# EAGLE board OmniBot_motor_driver (EAGLE 9.4.2)
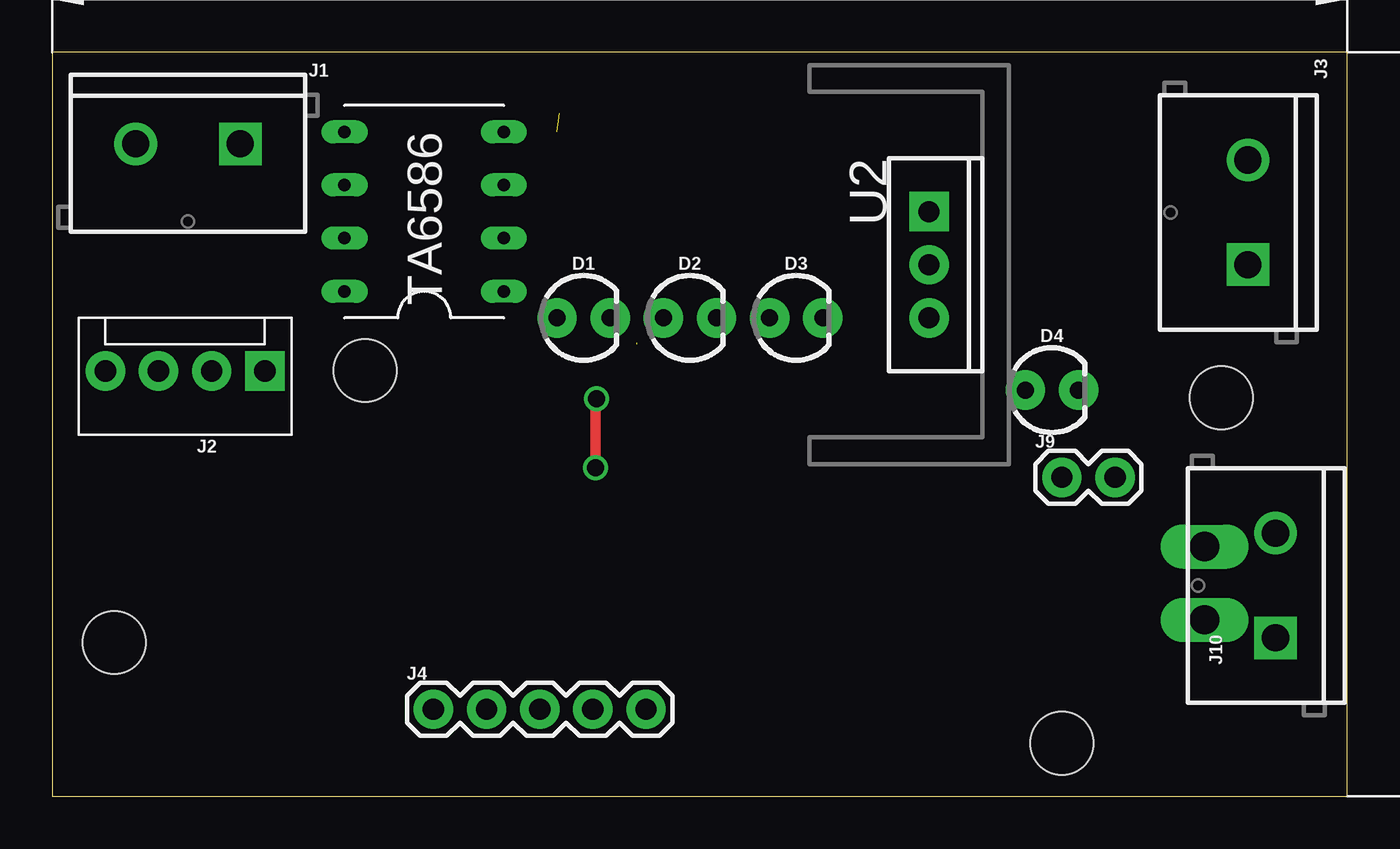
[diagram p0: board, top side]
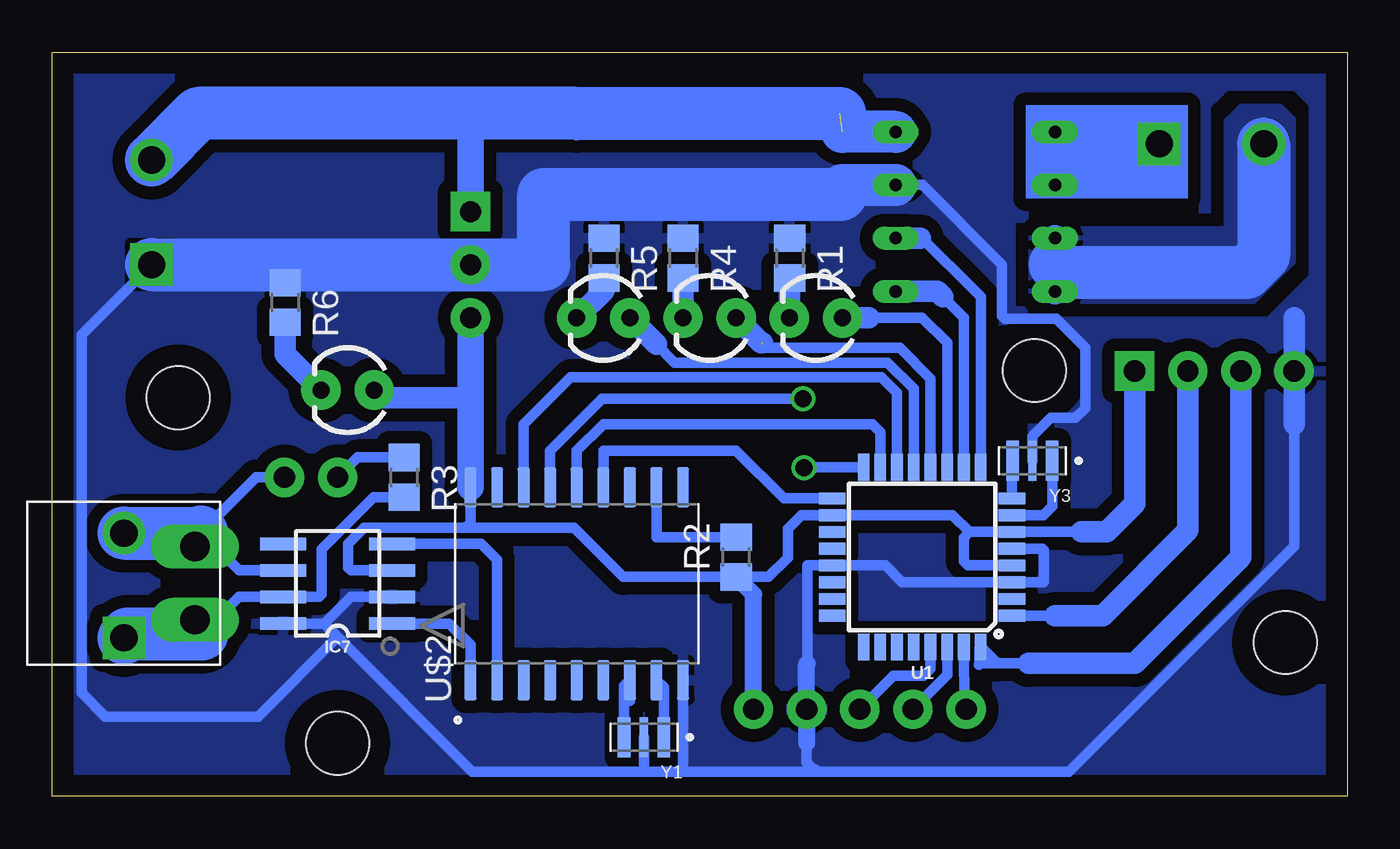
[diagram p1: board, bottom side, seen from below]

Size 61.9 x 35.55 mm. Coordinates in mm from the lower left corner, seen from the top.
Outline: 0,0 61.9,0 61.9,35.55 0,35.55 0,0
Copper layers (1*16): Top 0.035mm / dielectric 1.5mm / Bottom 0.035mm
Design rules "default": minimum track width 6mil, minimum drill 0.35mm, track to track 6mil, track to pad 6mil, pad to pad 6mil, via to via 6mil, smd to smd 6mil, copper to edge 40mil, drill to drill 6mil, minimum pad ring 10mil, minimum via ring 8mil, stop-mask expansion 4mil, vias tented up to drill 0mil, thermal gap 10mil
Net classes: 0 default: width 0.5 mm, drill 1.2 mm, clearance 0.2 mm
Holes 3 mm at 2.97,7.35 48.26,2.54 55.88,19.05 14.95,20.34

## Footprints (pad centres in the part's own frame; a part is rotated, then mirrored left to right if it is on the bottom)
LED_3MM = drill 0.813 pad 1.88: A -1.27,0; K 1.27,0
SOIC8 = smd 2.2 x 0.6: 1 -2.6,1.905; 2 -2.6,0.635; 3 -2.6,-0.635; 4 -2.6,-1.905; 5 2.6,-1.905; 6 2.6,-0.635; 7 2.6,0.635; 8 2.6,1.905
SCREWTERMINAL-5MM-2 = drill 1.3 pad 2.032 square: 1 0,0 | drill 1.3 pad 2.032: 2 5,0
MOLEX-1X4 = drill 1.016 pad 1.88 square: 1 0,0 | drill 1.016 pad 1.88: 2 2.54,0; 3 5.08,0; 4 7.62,0
1X05 = drill 1.016 pad 1.88: 1 0,0; 2 2.54,0; 3 5.08,0; 4 7.62,0; 5 10.16,0
1X02 = drill 1.016 pad 1.88: 1 0,0; 2 2.54,0
R0805 = smd 1.3 x 1.5: 1 -0.95,0; 2 0.95,0
TQFP32-08 = smd 1.27 x 0.559: 1 -4.293,2.8; 2 -4.293,2; 3 -4.293,1.2; 4 -4.293,0.4; 5 -4.293,-0.4; 6 -4.293,-1.2; 7 -4.293,-2; 8 -4.293,-2.8; 17 4.293,-2.8; 18 4.293,-2; 19 4.293,-1.2; 20 4.293,-0.4; 21 4.293,0.4; 22 4.293,1.2; 23 4.293,2; 24 4.293,2.8 | smd 0.559 x 1.27: 9 -2.8,-4.293; 10 -2,-4.293; 11 -1.2,-4.293; 12 -0.4,-4.293; 13 0.4,-4.293; 14 1.2,-4.293; 15 2,-4.293; 16 2.8,-4.293; 25 2.8,4.293; 26 2,4.293; 27 1.2,4.293; 28 0.4,4.293; 29 -0.4,4.293; 30 -1.2,4.293; 31 -2,4.293; 32 -2.8,4.293
TO220-IGO = drill 1 pad 1.88: GND 0,0; OUT 2.54,0 | drill 1 pad 1.88 square: IN -2.54,0
15EDGRC-3.5-2P-PAK = drill 1.4 long: P$1 -1.75,-3.4; P$2 1.75,-3.4
SOIC127P1030X265-18N = smd 1.91 x 0.6: 1 -4.61,5.08; 2 -4.61,3.81; 3 -4.61,2.54; 4 -4.61,1.27; 5 -4.61,0; 6 -4.61,-1.27; 7 -4.61,-2.54; 8 -4.61,-3.81; 9 -4.61,-5.08; 10 4.61,-5.08; 11 4.61,-3.81; 12 4.61,-2.54; 13 4.61,-1.27; 14 4.61,0; 15 4.61,1.27; 16 4.61,2.54; 17 4.61,3.81; 18 4.61,5.08
TA6586-FOOTPRINT = drill 0.6 long: BI -3.81,3.81; BO1 3.81,1.27; BO2 3.81,3.81; FI -3.81,1.27; FO1 3.81,-3.81; FO2 3.81,-1.27; GND -3.81,-1.27; VCC -3.81,-3.81
OSC_CSTCE16M0V53-R0 = smd 0.6 x 1.9: 1 -0.95,0; 3 0.95,0 | smd 0.4 x 1.9: 2 0,0

## Placement (x,y rotation side)
D1  [LED_3MM]  25.4,22.86 0 top
D2  [LED_3MM]  30.48,22.86 0 top
D3  [LED_3MM]  35.56,22.86 0 top
D4  [LED_3MM]  47.78,19.41 0 top
IC7  TJA1050T  [SOIC8]  48.26,10.16 180 bottom
J1  MOTOR  [SCREWTERMINAL-5MM-2]  8.99,31.17 180 top
J2  encoder_port  [MOLEX-1X4]  10.16,20.32 180 top
J3  POWER  [SCREWTERMINAL-5MM-2]  57.15,25.4 90 top
J4  [1X05]  18.22,4.16 0 top
J9  RES JUMPER  [1X02]  48.26,15.24 0 top
J10  CAN TERMINAL  [SCREWTERMINAL-5MM-2]  58.48,7.57 90 top
R1  10k  [R0805]  26.65,25.72 270 bottom
R2  10k  [R0805]  29.21,11.43 90 bottom
R3  10k  [R0805]  45.09,15.24 270 bottom
R4  10k  [R0805]  31.75,25.72 270 bottom
R5  10k  [R0805]  35.53,25.72 270 bottom
R6  10k  [R0805]  50.77,23.59 270 bottom
U1  ATMEGA328P_TQFP  [TQFP32-08]  20.32,11.43 180 bottom
U2  [TO220-IGO]  41.91,25.4 270 top
U$1  15EDGRC-3.5-2P  [15EDGRC-3.5-2P-PAK]  58.49,10.18 90 bottom
U$2  MCP2515-I/SO  [SOIC127P1030X265-18N]  36.83,10.16 90 bottom
U$3  TA6586  [TA6586-FOOTPRINT]  17.78,27.94 180 top
Y1  CSTCE16M0V53-R0  [OSC_CSTCE16M0V53-R0]  33.62,2.82 180 bottom
Y3  CSTCE16M0V53-R0  [OSC_CSTCE16M0V53-R0]  15.05,16.03 180 bottom

## Library data of the parts
D1-D4 = SparkFun-LED; PROD_ID: DIO-08794
IC7 = TJA1050; MF: NXP; MPN: TJA1050T
J1 J3 J10 = SparkFun-Connectors; SF_SKU: PRT-08432
J2 = SparkFun-Connectors; PROD_ID: CONN-08186; SF_ID: PRT-08231
J4 J9 = SparkFun-Connectors
R1-R6 = resistor
U1 = SparkFun-IC-Microcontroller; PROD_ID: IC-09069
U2 = SparkFun-IC-Power
U$1 = 15EDGRC-3.5-2P; AVAILABILITY: Not in stock; CHECK_PRICES: https://www.snapeda.com/parts/15EDGRC-3.5/2P/Degson/view-part/?ref=eda; DESCRIPTION: Pluggable terminal block; socket; male; 3.5mm; angled 90°; ways: 2; MF: Degson; MP: 15EDGRC-3.5/2P; PACKAGE: None; PRICE: None; SNAPEDA_LINK: https://www.snapeda.com/parts/15EDGRC-3.5/2P/Degson/view-part/?ref=snap
U$2 = MCP2515-I_SO; AVAILABILITY: In Stock; CHECK_PRICES: https://www.snapeda.com/parts/MCP2515-I/SO/Microchip/view-part/?ref=eda; DESCRIPTION: Microchip CAN Controller 1Mbit/s CAN 2.0B 18-Pin SOIC W | Microchip Technology Inc. MCP2515-I/SO; MF: Microchip; MP: MCP2515-I/SO; PACKAGE: SOIC-18 Microchip; PRICE: None; PURCHASE-URL: https://www.snapeda.com/api/url_track_click_mouser/?unipart_id=39881&manufacturer=Microchip&part_name=MCP2515-I/SO&search_term=None; SNAPEDA_LINK: https://www.snapeda.com/parts/MCP2515-I/SO/Microchip/view-part/?ref=snap
U$3 = TA6586; AVAILABILITY: Not in stock; CHECK_PRICES: https://www.snapeda.com/parts/TA6586/Wuxi/view-part/?ref=eda; DESCRIPTION: DC Bidirectional motor driving circuit; MF: Wuxi; MP: TA6586; PACKAGE: Package; PRICE: None; SNAPEDA_LINK: https://www.snapeda.com/parts/TA6586/Wuxi/view-part/?ref=snap
Y1 Y3 = CSTCE16M0V53-R0; AVAILABILITY: In Stock; CHECK_PRICES: https://www.snapeda.com/parts/CSTCE16M0V53-R0/Murata+Electronics+North+America/view-part/?ref=eda; DESCRIPTION: 16 MHz Ceramic Resonator Built in Capacitor 15 pF ±0.3% -20°C ~ 80°C Surface Mount; MF: Murata; MP: CSTCE16M0V53-R0; PACKAGE: SMD-3 Murata; PRICE: None; SNAPEDA_LINK: https://www.snapeda.com/parts/CSTCE16M0V53-R0/Murata+Electronics+North+America/view-part/?ref=snap

## Nets
+5V: D4.A IC7.3 J2.1 J4.5 R2.1 U1.4 U1.6 U1.18 U2.OUT U$2.18
BI: U1.10 U$3.BI
CAN_CS: U1.14 U$2.16
FI: U1.9 U$3.FI
GND: IC7.2 IC7.8 J2.4 J3.1 J4.4 R1.1 R4.1 R5.1 R6.1 U1.3 U1.5 U1.21 U2.GND U$2.9 U$3.GND Y1.2 Y3.2
INT_0: J2.2 U1.1
INT_1: J2.3 U1.32
N$1: U1.8 Y3.3
N$2: U$2.8 Y1.1
N$3: U1.7 Y3.1
N$4: IC7.1 U$2.1
N$5: IC7.4 U$2.2
N$6: R2.2 U$2.11
N$7: J1.1 U$3.FO1 U$3.FO2
N$8: J1.2 U$3.BO1 U$3.BO2
N$9: U$2.7 Y1.3
N$10: IC7.6 J9.2 J10.2 U$1.P$2
N$11: D1.A U1.11
N$12: J9.1 R3.1
N$13: IC7.7 J10.1 R3.2 U$1.P$1
N$14: D2.A U1.12
N$15: D3.A U1.13
N$16: D1.K R1.2
N$17: D2.K R4.2
N$18: D3.K R5.2
N$19: D4.K R6.2
RST: J4.3 U1.29
RX: J4.2 U1.30
SPI_MISO: U1.16 U$2.15
SPI_MOSI: U1.15 U$2.14
SPI_SCK: U1.17 U$2.13
TX: J4.1 U1.31
V+: J3.2 U2.IN U$3.VCC

## Tracks (layer width: path | path; a pad name or v marks a point on that pad's centre or on a via)
+5V
  Bottom 0.5: U$2.18 41.91,13.08 42.16,12.83 | IC7.3 47.62,10.79 47.75,10.92 47.75,12.06 46.99,12.83 42.16,12.83 | R2.1 34.61,10.48 36.96,12.83 42.16,12.83 | 18.07,12.63 U1.6 12.7,12.63 | 18.07,12.63 18.33,12.37 18.33,11.24 18.13,11.03 U1.4 | 18.07,12.63 18.87,13.43 U1.18 26.08,13.43 26.74,12.77 26.74,11.41 27.67,10.48 R2.1 | 29.05,10.32 R2.1
  Bottom 0.813: J4.5 28.38,9.65 29.05,10.32
  Bottom 1.016: J2.1 10.16,13.97 11.5,12.63 12.7,12.63 | D4.A 46.16,19.05 41.91,19.05
  Bottom 1.27: U2.OUT 41.91,19.05 U$2.18
BI
  Bottom 0.5: 18.32,22.86 19.32,23.86
  Bottom 0.508: U1.10 18.32,22.86
  Bottom 1.016: 19.32,23.86 19.59,24.13 U$3.BI
CAN_CS
  Bottom 0.5: U$2.16 39.37,17.78 37.12,20.02 22.27,20.02 21.52,19.27 U1.14
FI
  Bottom 0.5: 17.78,24.13 20.32,26.67 20.41,26.67
  Bottom 0.508: U1.9 17.52,23.87 17.78,24.13
  Bottom 1.016: U$3.FI 20.41,26.67
GND
  Bottom 0.5: IC7.2 47.62,9.53 48.9,8.26 | 48.9,8.26 IC7.8 | U$2.9 31.75,1.27 31.85,1.17 33.02,1.17 33.61,1.17 33.62,1.18 | 33.62,1.18 Y1.2 | 33.62,1.18 41.82,1.18 48.26,7.62 | 48.9,8.26 48.26,7.62 | U1.5 14.58,11.83 14.5,11.75 14.5,10.25 14.52,10.23 U1.3 21.28,10.23 22.08,11.03 U1.21 25.81,11.03 25.81,6.35 | J3.1 60.49,22.06 60.49,4.94 59.36,3.81 52.07,3.81 48.26,7.62 | 25.84,2.54 25.84,1.61 25.49,1.27 25.4,1.27 | U2.GND 38.41,25.4 38.1,25.4 | U$3.GND 20.31,29.21 16.5,25.41 16.5,22.96 16.36,22.81 13.91,22.81 12.53,21.43 12.53,18.55 13,18.08 14.17,18.08 15.05,17.2 Y3.2 | 13.32,1.17 2.54,11.95 2.54,17.78
  Bottom 0.508: 33.02,1.17 13.32,1.17
  Bottom 0.813: 25.81,6.35 25.84,6.32 J4.4 25.84,2.54
  Bottom 1.016: 2.54,17.78 J2.4 2.54,22.86
  Bottom 1.27: 24.21,28.77 24.13,28.85 24.13,29.21
  Bottom 2: 24.13,29.21 U$3.GND
  Bottom 2.54: J3.1 38.41,25.4 38.41,28.77 24.21,28.77
  pour Bottom (isolate 0.61, rank 3): -1.27,38.1 -1.27,-1.27 63.5,-1.27 63.5,38.1
INT_0
  Bottom 0.5: 13.97,8.63 U1.1
  Bottom 1.016: J2.2 7.62,12.7 11.69,8.63 13.97,8.63
INT_1
  Bottom 0.5: 15.24,6.35 16.73,6.35 | 16.73,6.35 17.56,6.35 17.59,6.32 | 17.62,6.29 17.59,6.32 | 17.59,6.32 17.59,7.07 U1.32 16.73,6.35
  Bottom 1.016: J2.3 5.08,11.43 10.16,6.35 15.24,6.35
N$1
  Bottom 0.5: Y3.3 16.03,16 U1.8
N$2
  Bottom 0.5: Y1.1 32.67,5.2 U$2.8
N$3
  Bottom 0.5: Y3.1 14.1,13.86 14.53,13.43 U1.7
N$4
  Bottom 0.5: U$2.1 41.91,7.24 42.93,8.26 IC7.1
N$5
  Bottom 0.5: U$2.2 40.64,11.3 41.4,12.06 IC7.4
N$6
  Bottom 0.5: R2.2 29.22,12.37 33.02,12.37 U$2.11
N$7
  Bottom 1.27: U$3.FO1 13.97,30.47 U$3.FO2
  Bottom 2.54: 13.97,30.47 13.86,30.58 J1.1 13.39,31.17 U$3.FO1
N$8
  Bottom 1.27: U$3.BO1 13.97,25.4 U$3.BO2
  Bottom 2.54: J1.2 3.99,25.85 4.8,25.04 13.61,25.04 13.97,25.4
  pour Bottom: 2.54,31.75 2.54,25.49 4.39,23.63 4.44,23.59 14.84,23.59 15.16,23.92 15.16,27.19 5.87,27.19 5.82,27.15 5.82,32.32 5.38,32.77 5.11,33.03 3.17,33.03 2.54,32.41
N$9
  Bottom 0.5: 34.29,4.57 U$2.7 34.57,5.27 Y1.3
N$10
  Bottom 0.5: IC7.6 52.96,10.79 54.74,12.57 | J9.2 52.16,15.24 54.78,12.62 54.84,12.57 54.84,12.18 U$1.P$2
  Bottom 2.54: J10.2 54.84,12.57 | 54.78,12.62 54.74,12.57
N$11
  Bottom 0.5: 22.86,22.86 20.32,22.86 19.12,21.66 U1.11
  Bottom 1.016: D1.A 22.86,22.86
N$12
  Bottom 0.5: R3.1 47.31,16.19 J9.1
N$13
  Bottom 0.5: R3.2 46.54,14.29 49.02,11.81 49.02,9.65 49.15,9.53 IC7.7 52.96,9.53 54.74,7.75 | U$1.P$1 57.62,8.43 58.3,7.75
  Bottom 2.54: 54.74,7.75 58.3,7.75 J10.1
N$14  (1 unrouted)
  Bottom 0.5: 27.94,21.59 27.78,21.43 21.38,21.43 19.92,19.96 U1.12
  Bottom 1.016: D2.A 28.03,21.68 27.94,21.68
N$15
  Bottom 0.5: U1.13 20.72,19.48 21.97,20.73 32.16,20.73 33.02,21.59
  Bottom 1.016: D3.A 33.02,21.59
N$16
  Bottom 0.5: 26.65,24.13 R1.2
  Bottom 1.016: D1.K 26.65,22.88 26.65,24.13
N$17
  Bottom 0.5: 31.75,24.13 R4.2
  Bottom 1.016: D2.K 31.75,24.13
N$18
  Bottom 0.5: 35.53,24.16 R5.2
  Bottom 1.016: D3.K 35.53,24.16
N$19
  Bottom 1.016: D4.K 50.77,21.12 R6.2
RST
  Bottom 0.5: U1.29 19.92,6.09 20.25,5.76 21.7,5.76 J4.3
RX
  Bottom 0.5: U1.30 19.12,5.8 J4.2
SPI_MISO  (via drill 0.8)
  Top 0.5: v26.01,19 26.25,18.76 25.97,18.48 v25.97,15.7
  Bottom 0.5: U$2.15 38.1,16.51 35.62,19 v26.01,19 | U1.16 25.95,15.72 v25.97,15.7
SPI_MOSI
  Bottom 0.5: U$2.14 36.83,16.51 35.56,17.78 22.7,17.78 22.32,17.41 U1.15
SPI_SCK
  Bottom 0.5: U$2.13 35.56,16.51 29.21,16.51 26.93,14.23 U1.17
TX
  Bottom 0.5: U1.31 18.31,4.25 J4.1
V+  (1 unrouted)
  Bottom 0.813: 36.83,31.75 36.83,32.63
  Bottom 1.27: U2.IN 41.91,32.63
  Bottom 2: U$3.VCC 24.13,31.75
  Bottom 2.54: J3.2 54.92,32.63 41.91,32.63 36.83,32.63 24.25,32.63
(copper drawn outside any net)
  shapes: Bottom area x1